# Altium PCB arduino-nano_autoroute.PcbDoc
Units mil, origin at the board's own origin, x right, y up, seen from the top; angles counter-clockwise.
Board outline 720 x 1780 mil, 6 copper layers (Top Layer, VCC, Signal Layer Top, Signal Layer Bottom, GND, Bottom Layer), stack 32.066 mil thick; 25 components, 41 nets, 165 pads, 84 vias.
Unrouted connection lines stored in the file: 34.
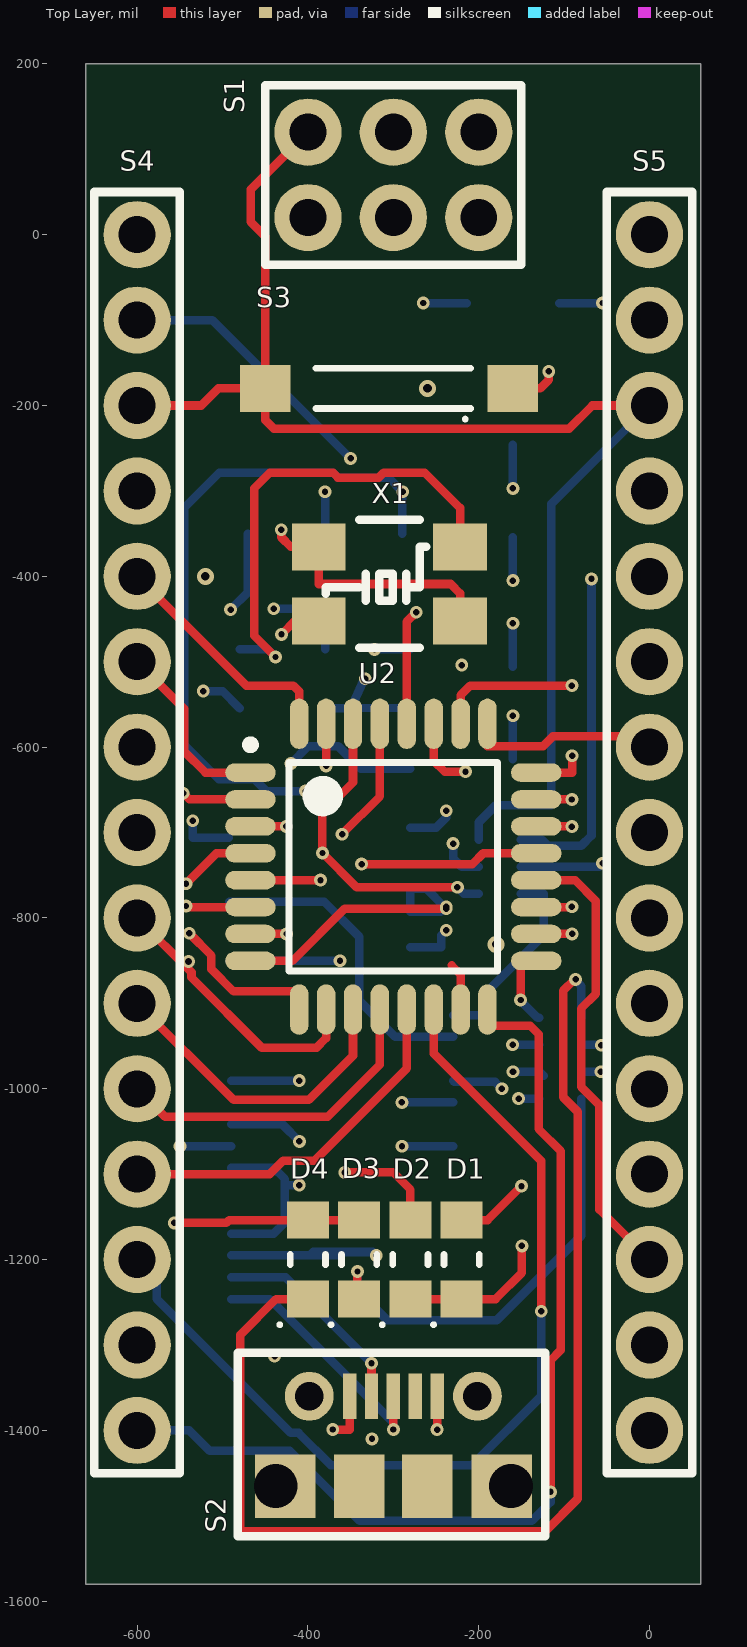
[diagram p0: Top Layer view]
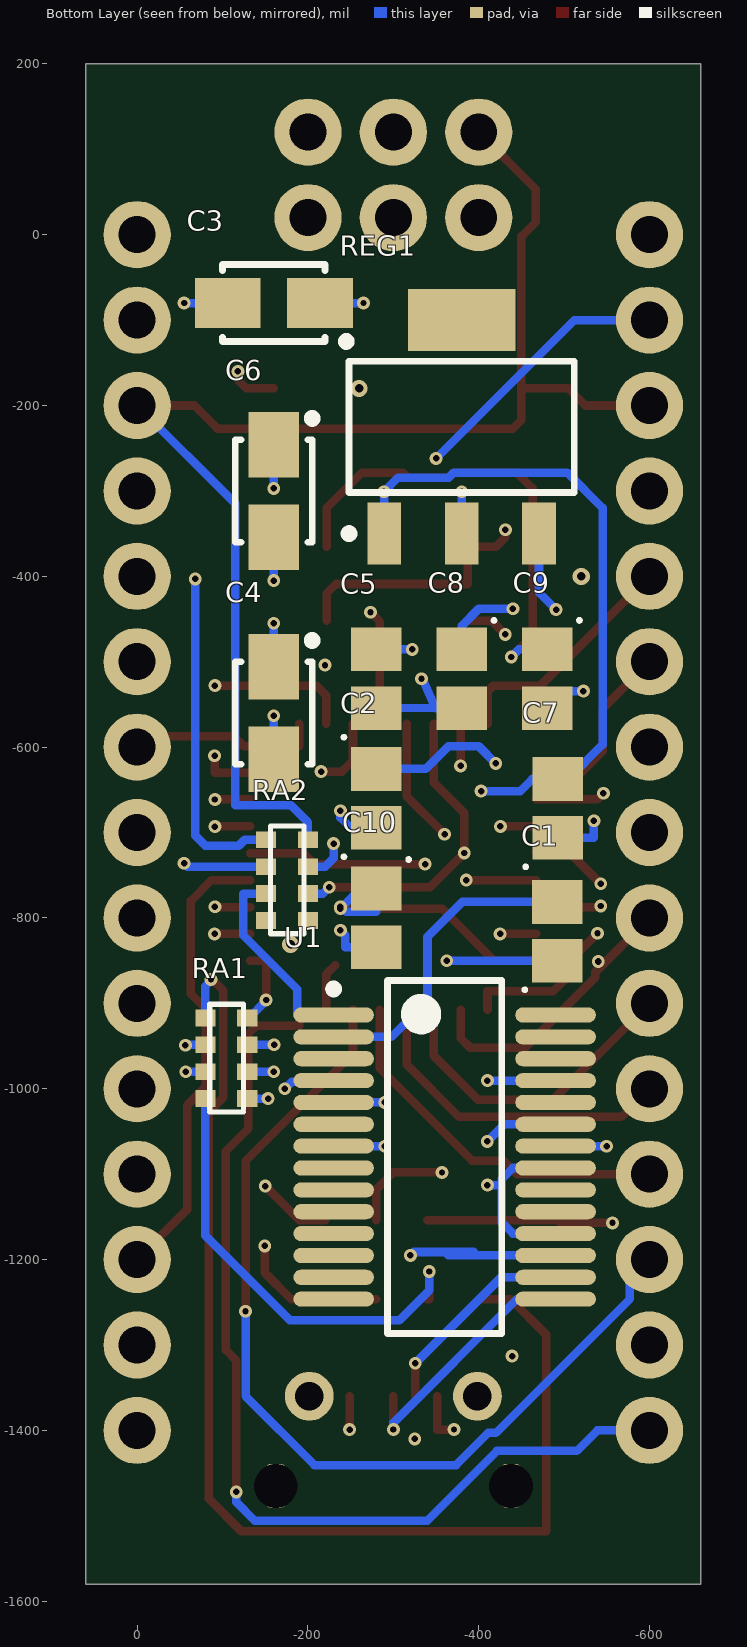
[diagram p1: Bottom Layer view, seen from below]
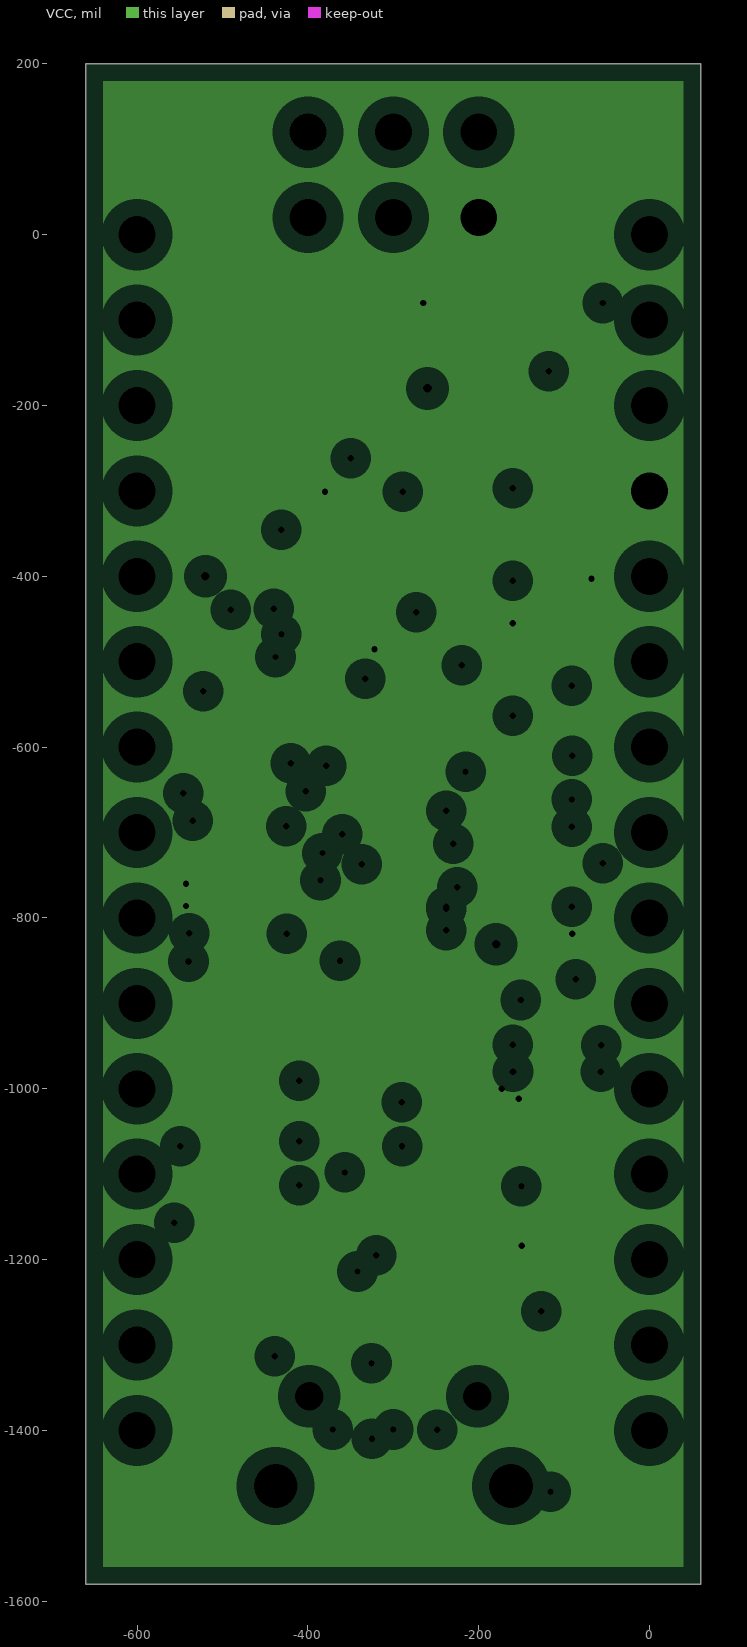
[diagram p2: VCC, clearances drawn from the general rule]
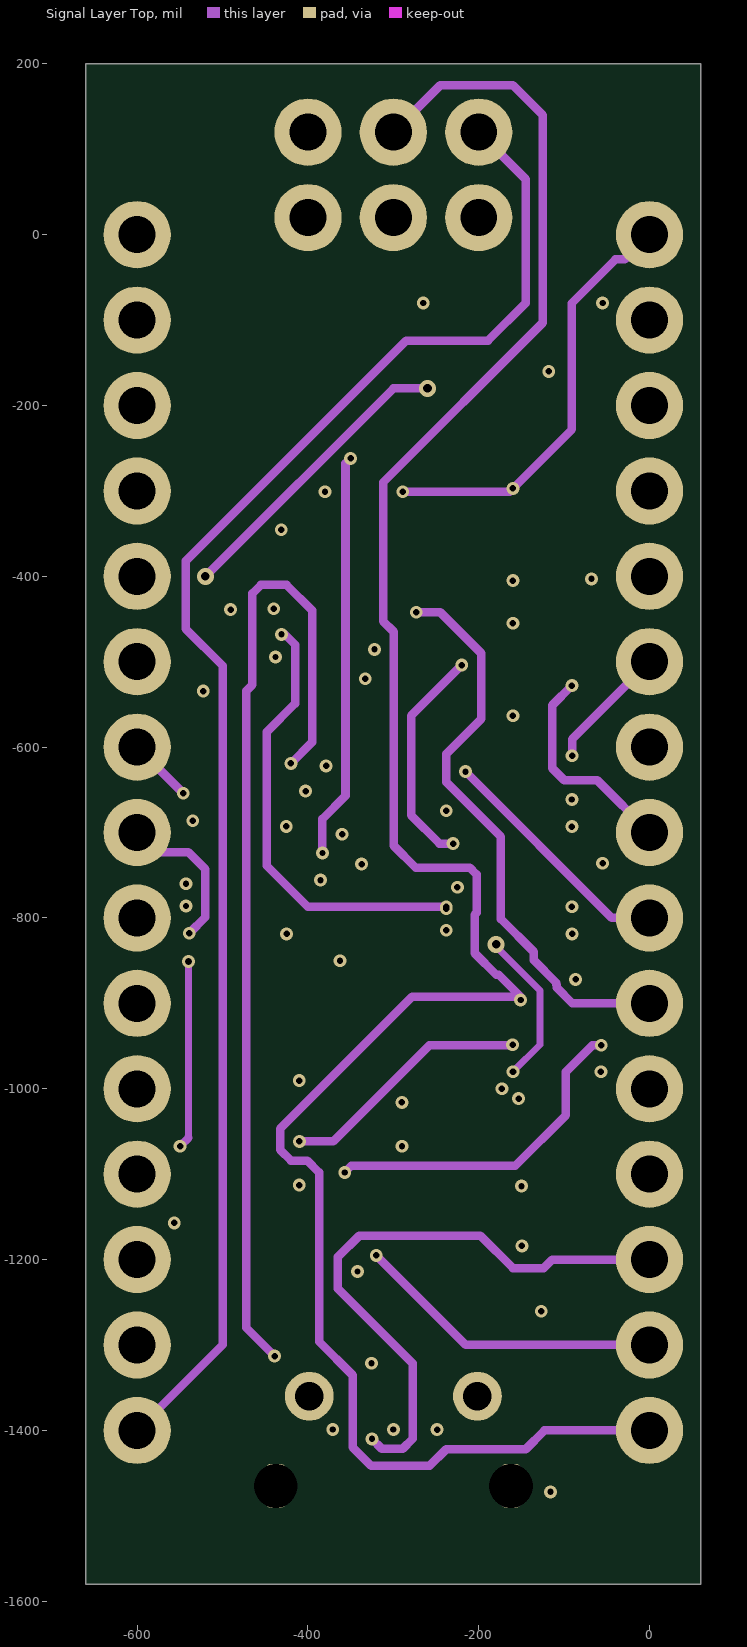
[diagram p3: Signal Layer Top]
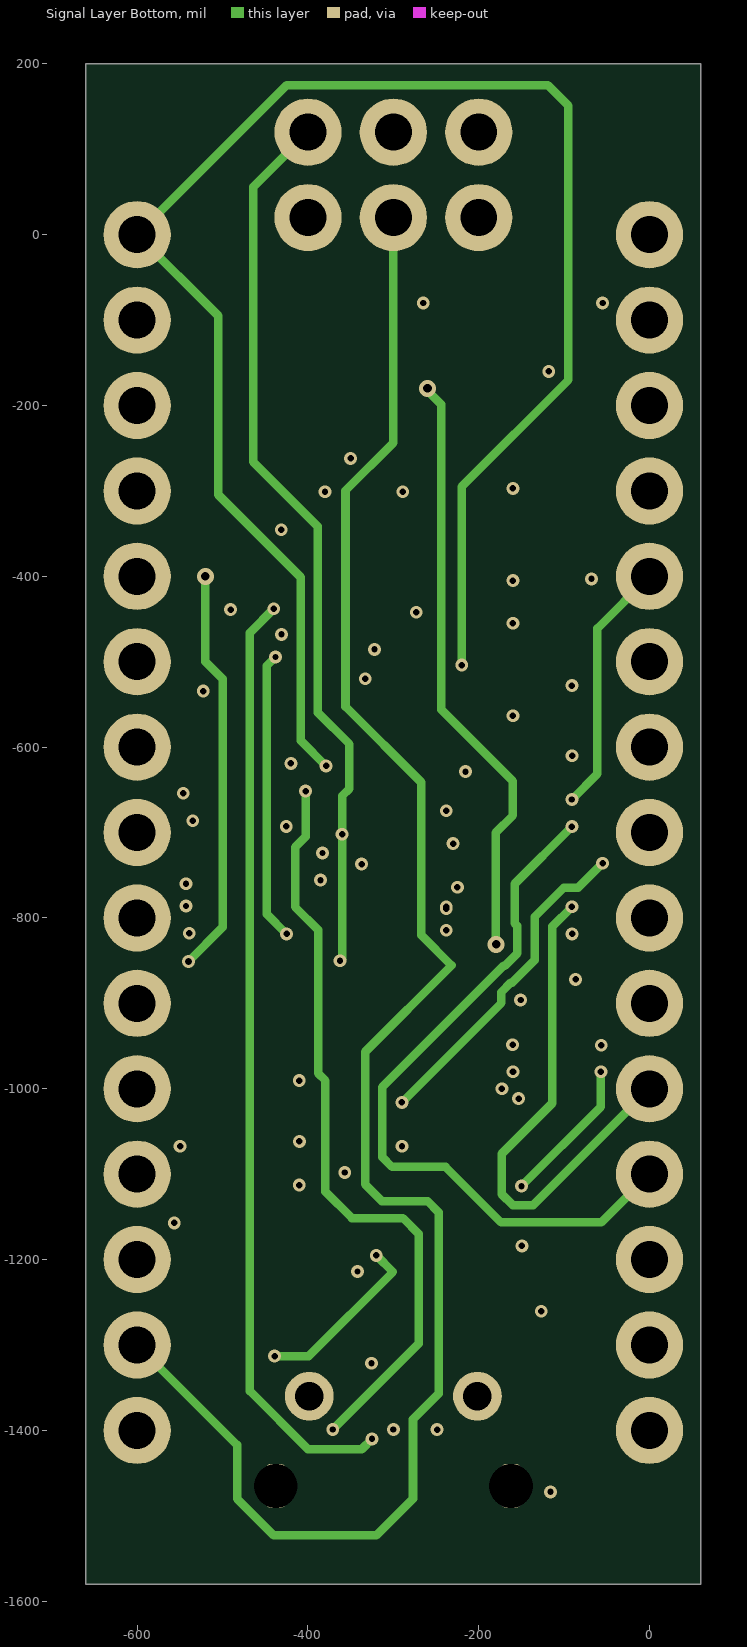
[diagram p4: Signal Layer Bottom]
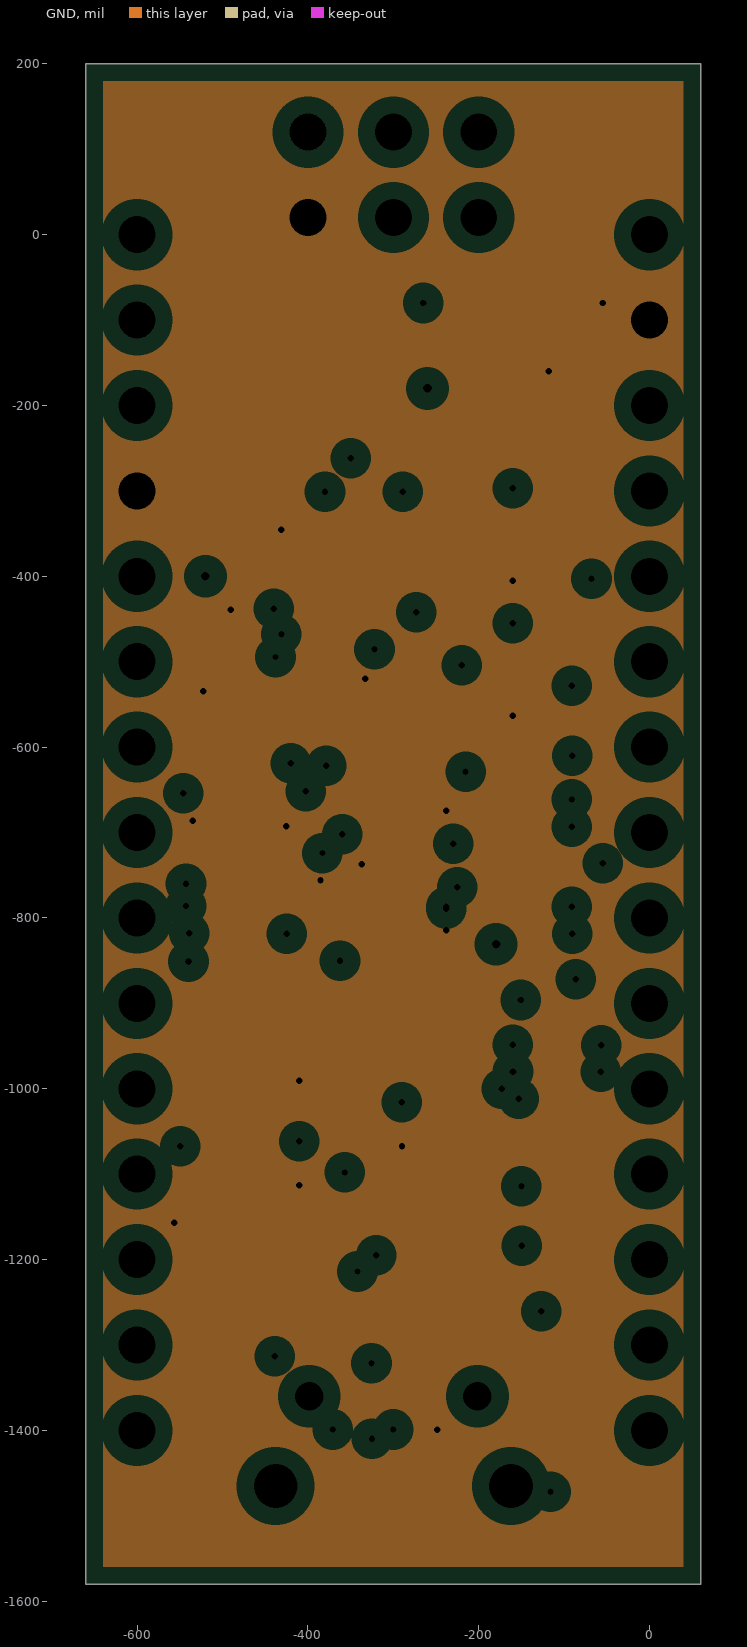
[diagram p5: GND, clearances drawn from the general rule]

## Layer stack, top to bottom
Top Solder: solder mask 0.4, Solder Resist, Dk 3.5
Top Layer: signal copper 1.378
Dielectric 2: prepreg 2.8, PP-006, Dk 4.1
VCC: plane copper 1.378, net 5V
Dielectric 4: prepreg 2.8, PP-006, Dk 4.1
Signal Layer Top: signal copper 1.378
Dielectric 1: dielectric 12.5984, FR-4, Dk 4.8
Signal Layer Bottom: signal copper 1.378
Dielectric 5: prepreg 2.8, PP-006, Dk 4.1
GND: plane copper 1.378, net GND
Dielectric 3: prepreg 2.8, PP-006, Dk 4.1
Bottom Layer: signal copper 1.378
Bottom Solder: solder mask 0.4, Solder Resist, Dk 3.5

## Board outline
-660,-1580 60,-1580 60,200 -660,200

## Design rules (kind name [scope] priority, off if disabled: settings)
Clearance [All] p1: gap=10 ignorepadtopadclearanceinfootprint=FALSE except(0: Arc-Hole Track-Hole SMDPad-Hole THPad-Hole Via-Hole Fill-Hole Poly-Hole Region-Hole Text-Hole)
PlaneClearance [All] p1: clearance=20
PlaneConnect [All] p1: planeconnectstyle=Relief reliefexpansion=20 reliefentries=4 reliefconductorwidth=10 reliefairgap=10
PolygonConnect [All] p1: connectstyle=Relief reliefconductorwidth=10 reliefentries=4 polygonreliefangle="90 Angle" airgapwidth=10
RoomDefinition arduino-nano [InComponentClass('arduino-nano')] p1: confinementstyle=ConfineIn formatcopy=TRUE lockcomponents=FALSE outline -5560,-2600 -3560,-2600 -3560,-1600 -5560,-1600
RoutingVias [All] p1: holewidth=7.5 width=15 viastyle="Through Hole" minholewidth=5 minwidth=10 maxholewidth=10 maxwidth=20
SolderMaskExpansion [All] p1: expansion=4 istentingtop=FALSE
Width [All] p1: maxlimit=10 minlimit=8 preferedwidth=10 minimp=50.000000 maximp=50.000000 favimp=50.000000
28 further rules are at their usual default settings.

## Components (designator, comment, footprint, x,y, rotation, side; value= is the part's Value field where it differs from the comment)
C1 "100nF Ceramic Multilayer Capacitor_1" CAPCP2012X09N -491.87,-815.68 r90 bottom
C2 "100nF Ceramic Multilayer Capacitor_1" CAPCP2012X09N -280,-660 r90 bottom
C3 "Capacitor SMT Tantalum" "CASE A - 3216X18" -160,-80 r0 bottom value=4.7µF
C4 "Capacitor SMT Tantalum" "CASE A - 3216X18" -160,-560 r270 bottom value=4.7µF
C5 "100nF Ceramic Multilayer Capacitor_1" CAPCP2012X09N -280,-520 r90 bottom
C6 "Capacitor SMT Tantalum" "CASE A - 3216X18" -160,-300 r270 bottom value=4.7µF
C7 "100nF Ceramic Multilayer Capacitor_1" CAPCP2012X09N -492.75,-671.76 r90 bottom
C8 "100nF Ceramic Multilayer Capacitor_1" CAPCP2012X09N -380,-520 r270 bottom
C9 "C0805C180J5GACTU" CAPCP2012X09N -480,-520 r270 bottom
C10 "C0805C180J5GACTU" CAPCP2012X09N -280,-800 r270 bottom
D1 "Kingbright Green LED, 70 mcd 120 ° 0805" LED1913X12NGREEN -220,-1200 r90 top
D2 "Kingbright Red LED, 100 mcd 120 ° 0805" LED1913X12NRED -280,-1200 r90 top
D3 "Kingbright Blue LED, 60 mcd 120 ° 0805" LED1913X12NBLUE -340,-1200 r90 top
D4 "Kingbright Orange LED, 200 mcd 120 ° 0805" LED1913X12NYEL/ORANGE -400,-1200 r90 top
RA1 "1k +- 5% SMT Resistor Array" "1206 RA" -124,-917.01 r270 bottom
RA2 "1k +- 5% SMT Resistor Array" "1206 RA" -195,-708.5 r270 bottom
REG1 "LM1117MP-5.0/NOPB, Low Dropout Voltage Regulator, 1.5A, 5 V ±1%, 4-Pin SOT-223" SOT230P700X180-4N -380,-225 r90 bottom
S1 "Programming Headers Dual Row" "ISP HEADER" 495,-435 r180 top
S2 "NewMolex Right Angle SMT Female Type B Micro USB Connector, 30 V ac, 1.8A" MicroUSB -348.42,-1360 r0 top
S3 "Tactile Switch SPST- NO 0.05A @24V" Button8014X17N -300,-180 r180 top
S4 "connector;str header;single row;.1 cont centers;.095 tail;gold or gtx;36 contact" Header -600,0 r270 top
S5 "connector;str header;single row;.1 cont centers;.095 tail;gold or gtx;36 contact" Header 0,0 r270 top
U1 "FT232RL, Universal Asynchronous Receiver & Transmitter 3MBd, 28-Pin, SSOP" SOP65P780X200-28N -360,-1080 r180 bottom
U2 "ATMEGA328P-AU" TQFP80P900X900X120-32N -300,-740 r0 top
X1 "Aker 16MHz Crystal SMT" "Aker S5C Crystal" -221.89,-365.51 r0 top value=16MHz

## Footprints (in the part's own frame and the unit in brackets; to place one, negate y for a bottom-side part, rotate by r counter-clockwise, add the part's x,y. Pads: shape width x height; smd on the part's side, far side on the other; paste and mask are expansions set on the pad)
"1206 RA" [mm]
  rect 0.5x0.6 smd: 1(0,0.127) 2(0.8,0.127) 3(1.6,0.127) 4(2.4,0.127) 5(0,-1.118) 6(0.8,-1.118) 7(1.6,-1.118) 8(2.4,-1.118)
  silkscreen extent -0.41,-0.99 2.79,0.01, body extent -0.41,-1.31 2.79,0.29, height 0.5
"Aker S5C Crystal" [mm]
  rect 1.6x1.4 smd: 1(0,0) 2(-4.2,0) 3(0,-2.2) 4(-4.2,-2.2)
  round 0.254 on Top Overlay: 5(-3,-2.4)
  silkscreen extent -4,-3 -1,0.8, body extent -4.7,-2.8 0.5,0.6, height 1
Button8014X17N [mm] "Chip Inductor, 2-Leads, Body 8.00x1.40mm, IPC Medium Density"
  rect 1.5x1.4 smd: 1(-3.556,0) 2(3.81,0)
  silkscreen extent -2.3,-0.6 2.3,0.96, body extent -3.79,-1.92 4.21,1.78, height 2.5
CAPCP2012X09N [mm] "Chip Capacitor, 2-Leads, Body 2.00x1.25mm, IPC Medium Density"
  rect 1.3x1.5 smd: 1(-0.875,0) 2(0.875,0)
  silkscreen extent -1.79,0.91 -1.69,1.01, body extent -1.05,-0.57 0.95,0.68, height 0.78
"CASE A - 3216X18" [mm] "Molded Capacitor, 2-Leads, Body 3.2x1.6mm, IPC Medium Density"
  rect 1.95x1.5 smd: 1(-1.375,0) 2(1.375,0)
  silkscreen extent -2.28,-1.14 1.52,1.27, body extent -1.52,-0.76 1.65,0.84, height 1.77
Header [mm] "SIL Header"
  round 2 hole 1.1: 1(0,0) 2(2.54,0) 3(5.08,0) 4(7.62,0) 5(10.16,0) 6(12.7,0) 7(15.24,0) 8(17.78,0) 9(20.32,0) 10(22.86,0) 11(25.4,0) 12(27.94,0) 13(30.48,0) 14(33.02,0) 15(35.56,0)
  silkscreen extent -1.27,-1.27 36.83,1.27, body extent -1.33,-1.35 36.93,1.35, height 8.6
"ISP HEADER" [mm] "SIL Header for programming"
  round 2 hole 1.1: 1(17.653,-14.097) 2(17.653,-11.557) 3(20.193,-14.097) 4(20.193,-11.557) 5(22.733,-14.097) 6(22.733,-11.557)
  silkscreen extent 16.38,-15.49 24,-10.16, body extent 16.38,-15.37 24,-10.29, height 8
LED1913X12NBLUE [mm] "LED 2-Leads, Body 1.90x1.32mm, IPC Medium Density"
  rect 1.1x1.25 smd: 1(-1.175,0) 2(1.175,0)
  silkscreen extent -1.99,-0.53 0.15,0.89, body extent -1,-0.62 1.02,0.62, height 1.1
LED1913X12NGREEN [mm] "LED 2-Leads, Body 1.90x1.32mm, IPC Medium Density"
  rect 1.1x1.25 smd: 1(-1.175,0) 2(1.175,0)
  silkscreen extent -1.99,-0.53 0.15,0.89, body extent -1.01,-0.62 1.01,0.63, height 1.1
LED1913X12NRED [mm] "LED 2-Leads, Body 1.90x1.32mm, IPC Medium Density"
  rect 1.1x1.25 smd: 1(-1.175,0) 2(1.175,0)
  silkscreen extent -1.99,-0.53 0.15,0.89, body extent -1.02,-0.43 1.04,0.47, height 0.85
LED1913X12NYEL/ORANGE [mm] "LED 2-Leads, Body 1.90x1.32mm, IPC Medium Density"
  rect 1.1x1.25 smd: 1(-1.175,0) 2(1.175,0)
  silkscreen extent -1.99,-0.53 0.15,0.89, body extent -1.01,-0.62 1.01,0.63, height 1.1
MicroUSB [mm] "MicroUSB  Molex 5Pin"
  rect 0.4x1.35 smd: 1(-0.07,0) 2(0.58,0) 3(1.23,0) 4(1.88,0) 5(2.53,0)
  rrect50% 0.6x1.3 hole 1.3: ""(-2.27,-2.667) ""(-2.27,-2.667) ""(4.73,-2.667)
  rect 1.8x1.9 smd: ""(-1.98,-2.678) ""(4.45,-2.678)
  round 1.45 hole 0.85: ""(-1.27,0) ""(3.73,0)
  rect 1.5x1.9 smd: ""(0.218,-2.678) ""(2.242,-2.678)
  silkscreen extent -3.39,-4.17 5.75,1.3, body extent -2.83,-5.32 5.37,0.11, height 2.68
SOP65P780X200-28N [mm] "SOP, 28-Leads, Body 10.20x5.30mm, Pitch 0.65mm, IPC Medium Density"
  oval 2.4x0.45 smd: 1(-3.3,4.225) 2(-3.3,3.575) 3(-3.3,2.925) 4(-3.3,2.275) 5(-3.3,1.625) 6(-3.3,0.975) 7(-3.3,0.325) 8(-3.3,-0.325) 9(-3.3,-0.975) 10(-3.3,-1.625) 11(-3.3,-2.275) 12(-3.3,-2.925) 13(-3.3,-3.575) 14(-3.3,-4.225) 15(3.3,-4.225) 16(3.3,-3.575) 17(3.3,-2.925) 18(3.3,-2.275) 19(3.3,-1.625) 20(3.3,-0.975) 21(3.3,-0.325) 22(3.3,0.325) 23(3.3,0.975) 24(3.3,1.625) 25(3.3,2.275) 26(3.3,2.925) 27(3.3,3.575) 28(3.3,4.225)
  silkscreen extent -3.43,-5.25 1.7,5.25, body extent -3.91,-5.1 3.91,5.1, height 2
SOT230P700X180-4N [mm] "SOT223, 4-Leads, Body 6.50x7.00mm (avg), Pitch 2.30mm, IPC Medium Density"
  rect 1.85x1 smd: 1(-3.175,2.3) 2(-3.175,0) 3(-3.175,-2.3)
  rect 1.85x3.2 smd: 4(3.175,0)
  silkscreen extent -3.3,-3.35 1.95,3.48, body extent -3.8,-3.12 3.29,3.38, height 1.65
TQFP80P900X900X120-32N [mm] "TQFP, 32-Leads, Body 7.00x7.00mm, Pitch 0.80mm, IPC Medium Density"
  oval 1.5x0.55 smd: 1(-4.25,2.8) 2(-4.25,2) 3(-4.25,1.2) 4(-4.25,0.4) 5(-4.25,-0.4) 6(-4.25,-1.2) 7(-4.25,-2) 8(-4.25,-2.8) 17(4.25,-2.8) 18(4.25,-2) 19(4.25,-1.2) 20(4.25,-0.4) 21(4.25,0.4) 22(4.25,1.2) 23(4.25,2) 24(4.25,2.8)
  oval 0.55x1.5 smd: 9(-2.8,-4.25) 10(-2,-4.25) 11(-1.2,-4.25) 12(-0.4,-4.25) 13(0.4,-4.25) 14(1.2,-4.25) 15(2,-4.25) 16(2.8,-4.25) 25(2.8,4.25) 26(2,4.25) 27(1.2,4.25) 28(0.4,4.25) 29(-0.4,4.25) 30(-1.2,4.25) 31(-2,4.25) 32(-2.8,4.25)
  silkscreen extent -4.37,-3.1 3.1,3.75, body extent -4.43,-4.5 4.57,4.5, height 1.6

## Part data
C1 C2 C5 C7 C8: "AVX 0805 Standard 100nF Ceramic Multilayer Capacitor, 50 V dc X7R Dielectric ±10% SMD", Capacitance=100nF, Manufacturer=AVX, Package=0805, Voltage=50V, Creator="Ritesh Kanjee", Datasheet URL=http://za.rs-online.com/web/p/ceramic-multilayer-capacitors/4646688/, Date Created="18 February 2015", RS Stock No.=464-6688
C3 C4 C6: library part "4.7µF Tant RS 496-3545", "Capacitor,tantalum,SMT,16V,4.7uF,10%,A-case", Package=3216-18, Tolerance=10%, Voltage=16V, ComponentLink1Description="Supplier Website", ComponentLink1URL=http://za.rs-online.com/web/search/searchBrowseAction.html?method=getProduct&R=4963545, ComponentLink2Description="RS Data sheet", ComponentLink2URL=http://docs-europe.origin.electrocomponents.com/webdocs/04ed/0900766b804ed4cc.pdf, LatestRevisionDate=28-April-2010, Part Originator="H Theron", Publisher=DPSS, RS Stock Nr.=496-3545
C9 C10: library part "18pF Ceramic Multilayer Capacitor, 50 V dc C0G Dielectric ±5% SMD", "18pF Ceramic Multilayer Capacitor, 50 V dc C0G Dielectric ±5% SMD", Capacitance=18pF, Manufacturer=Kemet, Package=0805, Voltage=50V, Creator="Ritesh Kanjee", Datasheet URL=http://za.rs-online.com/web/p/ceramic-multilayer-capacitors/6480935/?searchTerm=C0805C180J5GACTU&relevancy-data=636F3D3226696E3D4931384E4B6E6F776E41734D504E266C753D656E266D6D3D6D61746368616C6C7061727469616C26706D3D5E5B5C707B4C7D5C707B4E647D2D2C2F255C2E5D2B2426706F3D313326736E3D592673743D4D414E5F504152545F4E554D4245522677633D424F5448267573743D4330383035433138304A35474143545526, Date Created="18 February 2015", RS Stock No.=648-0935
D1: Color=Green, Forward Voltage="2.1 V", Manufacturer=KingBright, Manufacturer Part No.=KP-2012MGC, Creator="Ritesh Kanjee", Datasheet URL=http://za.rs-online.com/web/p/visible-leds/4663778/, Date Created="18 February 2015", RS Stock No.=466-3778
D2: Color=RED, Forward Voltage=1.85V, Manufacturer=KingBright, Manufacturer Part No.=KP-2012SRC-PRV, Creator="Ritesh Kanjee", Datasheet URL=http://za.rs-online.com/web/p/visible-leds/4663813/, Date Created="18 February 2015", RS Stock No.=466-3813
D3: Color=Blue, Forward Voltage=3.2V, Manufacturer=KingBright, Manufacturer Part No.=KP-2012PBC-A, Creator="Ritesh Kanjee", Datasheet URL=http://za.rs-online.com/web/p/visible-leds/4663784/, Date Created="18 February 2015", RS Stock No.=466-3784
D4: Color=Orange, Forward Voltage=1.85V, Manufacturer=KingBright, Manufacturer Part No.=KP-2012SEC, Creator="Ritesh Kanjee", Datasheet URL=http://za.rs-online.com/web/p/visible-leds/4663790/, Date Created="18 February 2015", RS Stock No.=466-3790
RA1 RA2: "1k +- 5% SMT Resistor Array 4 Res", Manufacturer=Bourns, Manufacturer Part No.=CAY16-102J4LF, Creator="R Kanjee", Date Created="25 February 2015", RS Stock No.=552-5579, Wattage=0.25W
REG1: library part LM1117MP-5.0, Manufacturer="Texas Instruments", Maximum Input Voltage=15V, Output Voltage=5V, Supply Current=1.5Amps, Created By="R Kanjee", Datasheet URL=http://za.rs-online.com/web/p/low-dropout-voltage-regulators/5339583/, Date Created="26 February 2015", RS Stock No.=533-9583
S1: library part "Programming ISP, Programming Headers Dual Row", Current Rating="3Amps Continuous", Manufacturer=FCI, Manufacturer Part No.=68000-236HLF, Created By="R Kanjee", Date Created="1 March 2015", RS Stock No.=2509565626
S2: library part "Micro USB Connector, 30 V ac, 1.8A", Manufacturer=Molex, Manufacturer Part No.=105017-0001, Max Current=1.8A, Max Voltage=30V, Creator="R Kanjee", Datasheet URL=http://za.rs-online.com/web/p/micro-usb-connectors/8486764/, Date Created="28 February 2015", RS Stock No=848-6764
S3: Manufacturer=Omron, Manufacturer Part No.=B3F1000, Creator="R Kanjee", Date Created="25 February 2015", RS Stock No.=686-6847, State="Normaly Open"
S4 S5: library part "Single row; PCB headers", Current Rating="3Amps Continuous", Manufacturer=FCI, Manufacturer Part No.=68000-236HLF, Created By="R Kanjee", Date Created="1 March 2015", RS Stock No.=2509565626
U1: library part "FT232RL USB to UART, Universal Asynchronous Receiver & Transmitter 3MBd, 28-Pin, SSOP", Manufacturer="FTDI Chip", Manufacturer Part No.=FT232RL, Creator="R Kanjee", Date Created="03 March 2015", Pin Count=28, RS Stock No.=406-580
U2: "Microchip ATMEGA328P-AU, 8bit AVR Microcontroller, 20MHz, 1 kB, 32 kB Flash, 32-Pin TQFP", Company=ComputeChip, Created By="Rajiv Bishwokarma", Datasheet URL=https://docs.rs-online.com/5775/0900766b80db4deb.pdf, Date Created="December 31, 2020", RS Stock No.=696-3092
X1: library part "Aker  C5S-16.000-12-3030-X", "Aker S5C SMT Crystal", Frequency Stability=+/-30ppm, Load Capacitance=12pF, Manufacturer=Aker, Manufacturer Part #=C5S-16.000-12-3030-X, Package="3.2x5mm SMD", Creator="R Kanjee", HelpURL=http://za.rs-online.com/web/p/crystal-units/6719488/, RS="RS 671-9488", RS Stock Nr.=671-9488, Supplier=RS

## Via types
v1: diameter 15, hole 7.5, Top Layer to Bottom Layer, 79 vias
v2: diameter 20, hole 10, Top Layer to Bottom Layer, 3 vias
v3: diameter 15, hole 8, Top Layer to Bottom Layer, 2 vias

## Nets (pads, with @x,y where several pads share a name; then routed paths per layer and width w, separated by ;. In a path a pad name is that pad's centre, name@x,y a point inside that pad or via, vN(x,y) a via of type N, cw(c..) or ccw(c..) an arc to the next point about the centre after c; other vN are vias at no path point)
3V3: C2.2 S5.14 U1.17 | length 2169.6
  Signal Layer Top w10: v1(-439,-1313) -472,-1280 -472,-534 -465,-527 -465,-420 -455,-410 -425,-410 -395,-440 -395,-594 v1(-420,-619) ; v1(-320,-1195.16) -215.16,-1300 S5.14
  Signal Layer Bottom w10: v1(-439,-1313) -399,-1313 -300.5,-1214.5 v1(-320,-1195)
  Bottom Layer w10: U1.17 -398.16,-1195.16 ; v1(-420,-619) -400,-599 -364.55,-599 -338,-625.55 C2.2 ; v1(-320,-1195.16) -323.66,-1191.5 -360.84,-1191.5 -364.5,-1195.16 -398.16,-1195.16 ; v1(-320,-1195) -324,-1191 -394,-1191 -398.16,-1195.16
5V: C3.1 C4.1 C5.2 D1.1 D2.1 RA1.4 RA2.5 REG1.2 S1.2 S5.4 U1.4 U1.20 U2.4 U2.6 U2.18 | length 1053.4
  Top Layer w10: v1(-542.81,-786) -542.81,-787.24 U2.6 ; v1(-542.81,-760) -507.06,-724.25 U2.4 ; D2.1 D1.1 -180.22,-1246.26 -149.43,-1215.47 v1(-149.43,-1184) ; U2.18 v1(-90.65,-818.74)
  Bottom Layer w10: REG1.2 v1(-380,-301.08) ; v1(-322.03,-485.55) C5.2 ; v1(-265.02,-80) C3.1 ; U1.4 -228.6,-991.91 -180.94,-991.91 v1(-172.85,-1000) ; C4.1 v1(-160,-454.98) ; v1(-153.31,-1011.5) RA1.4 ; RA2.5 -126,-708.5 -119,-715.5 -80,-715.5 -68,-703.5 v1(-68,-403)
A0: S5.5 U2.23 | length 340.6
  Top Layer w10: U2.23 v1(-91,-661.26)
  Signal Layer Bottom w10: v1(-91,-661.26) -61,-631.26 -61,-461 S5.5
A1: S5.6 U2.24 | length 209.3
  Top Layer w10: U2.24 -90.76,-629.76 v1(-90.76,-610)
  Signal Layer Top w10: v1(-90.76,-610) -90.76,-590.76 S5.6
A2: S5.7 U2.25 | length 226
  Top Layer w10: U2.25 -189.76,-599 -124.76,-599 -113.26,-587.5 -12.5,-587.5 S5.7
A3: S5.8 U2.26 | length 419.8
  Top Layer w10: U2.26 -221.26,-539.26 -210,-528 v1(-91,-528)
  Signal Layer Top w10: v1(-91,-528) -114,-551 -114,-624.76 -100,-638.76 -61.24,-638.76 S5.8
A4: S5.9 U2.27 | length 372.3
  Top Layer w10: U2.27 -252.76,-615.94 -240,-628.7 v1(-215.47,-628.7)
  Signal Layer Top w10: v1(-215.47,-628.7) -44.17,-800 S5.9
A5: S5.10 U2.28 | length 809.8
  Top Layer w10: U2.28 -284.25,-453 v1(-273.25,-442)
  Signal Layer Top w10: v1(-273.25,-442) -245,-442 -197,-490 -197,-567 -238,-608 -238,-641 -174,-705 -174,-801.27 -135.66,-839.61 -135.66,-849.39 -109,-876.05 -109,-877.92 -108.47,-878.45 -108.47,-881.8 -90.27,-900 S5.10
A6: S5.11 U2.19 | length 647.2
  Top Layer w10: U2.19 -91.24,-787.24 v1(-91,-787)
  Signal Layer Bottom w10: v1(-91,-787) -114,-810 -114,-1017 -173,-1076 -173,-1123.5 -160,-1136.5 -136.5,-1136.5 S5.11
A7: S5.12 U2.22 | length 892.4
  Top Layer w10: U2.22 -91.24,-692.76 v1(-91,-693)
  Signal Layer Bottom w10: v1(-91,-693) -157.91,-759.91 -157.91,-806.19 -154.69,-809.41 -154.69,-841.29 -169.33,-855.94 -170.96,-855.94 -313,-997.98 -313,-1080 -301.48,-1091.52 -238.78,-1091.52 -173.8,-1156.5 -56.5,-1156.5 S5.12
AREF: C8.1 S5.13 U2.20 | length 2441.1
  Top Layer w10: U2.20 -87.25,-755.75 -63,-780 -63,-889 -80.19,-906.19 -80.19,-997.74 -58.61,-1019.32 -58.61,-1141.39 S5.13
  Signal Layer Top w10: v1(-325,-1410) -313.5,-1421.5 -289,-1421.5 -277.5,-1410 -277.5,-1321.5 -365,-1234 -365,-1197 -340,-1172 -198,-1172 -160,-1210 -124,-1210 -114,-1200 S5.13
  Signal Layer Bottom w10: v1(-440,-438) -468,-466 -468,-1354 -400,-1422 -337,-1422 v1(-325,-1410)
  Bottom Layer w10: v1(-440,-438) -400,-438 -380,-458 C8.1
D0/RX: RA2.3 S4.2 U2.30 | length 1161.5
  Top Layer w10: U2.30 -347.24,-641.24 -383,-677 v1(-383,-724) -343.03,-763.97 v1(-225.03,-763.97)
  Signal Layer Top w10: v1(-383,-724) -383,-684 -356,-657 -356,-267.77 v1(-350.09,-261.91) v1(-350.09,-261.91)
  Bottom Layer w10: S4.2 -512,-100 v1(-350.09,-261.91) ; v1(-225.03,-763.97) -217.5,-771.5 RA2.3
D1/TX: RA2.2 S4.1 U2.31 | length 2371.4
  Top Layer w10: v1(-378.74,-622) U2.31
  Signal Layer Top w10: v1(-230,-713) -246,-713 -279,-680 -279,-563 v1(-220,-504)
  Signal Layer Bottom w10: v1(-378.74,-622) -408.5,-592.24 -408.5,-401 -505,-304.5 -505,-95 S4.1 -425,175 -119,175 -95,151 -95,-170 -220,-295 v1(-220,-504)
  Bottom Layer w10: v1(-230,-713) -230,-730 -220,-740 RA2.2
D2: S4.5 U2.32 | length 283.5
  Top Layer w10: S4.5 -471.95,-528.05 -416.95,-528.05 -410.24,-534.76 U2.32
D3: S4.6 U2.1 | length 215.6
  Top Layer w10: S4.6 -545,-555 -545,-604.76 -520,-629.76 U2.1
D4: S4.7 U2.2 | length 158.1
  Top Layer w10: v1(-546,-654) -538.74,-661.26 U2.2
  Signal Layer Top w10: S4.7 v1(-546,-654)
D5: S4.8 U2.9 | length 368.3
  Top Layer w10: v1(-539,-818) -513,-844 -513,-860 -487,-886 -410.24,-886 U2.9
  Signal Layer Top w10: S4.8 -577,-723 -540,-723 -520,-743 -520,-799 v1(-539,-818)
D6: S4.9 U2.10 | length 325.8
  Top Layer w10: S4.9 -536.35,-863.65 -536.35,-869.65 -454,-952 -390,-952 -378.74,-940.74 U2.10
D7: S4.10 U2.11 | length 374.9
  Top Layer w10: S4.10 -487.07,-1012.93 -398.93,-1012.93 -347.24,-961.24 U2.11
D8: S4.11 U2.12 | length 387.7
  Top Layer w10: S4.11 -567.07,-1032.93 -376.93,-1032.93 -315.75,-971.75 U2.12
D9: S4.12 U2.13 | length 435.9
  Top Layer w10: S4.12 -444.89,-1100 -429,-1084.11 -392.11,-1084.11 -284.25,-976.25 U2.13
D10: S4.13 U2.14 | length 1137.9
  Top Layer w10: U2.14 -252.76,-958.74 -126.93,-1084.57 v1(-126.93,-1260.5)
  Bottom Layer w10: S4.13 -577,-1200 -577,-1246.11 -420.07,-1403.04 -410.96,-1403.04 -373.38,-1440.62 -207.62,-1440.62 -126.93,-1359.93 v1(-126.93,-1260.5)
D11/MOSI: S1.4 S4.14 U2.15 | length 2222.2
  Top Layer w10: -231.76,-855.5 -221.26,-866 U2.15
  Signal Layer Bottom w10: S4.14 -483,-1417 -483,-1480 -440,-1523 -320,-1523 -277,-1480 -277,-1387 -247,-1357 -247,-1144.5 -260,-1131.5 -313.5,-1131.5 -333,-1112 -333,-956.74 -231.76,-855.5 -267.26,-820 -267.26,-641.18 -356,-552.44 -356,-299.64 -300,-243.64 S1.4
D12/MISO: S1.1 S4.15 U2.16 | length 3006.8
  Top Layer w10: U2.16 -189.76,-926 -140,-926 -130,-936 -130,-1047 -104,-1073 -104,-1306 -116,-1318 v1(-116,-1472)
  Signal Layer Top w10: S4.15 -499.53,-1299.53 -499.53,-505 -543,-461.53 -543,-382 -285,-124 -189,-124 -145,-80 -145,65 S1.1
  Bottom Layer w10: S4.15 -539,-1400 -515,-1424 -421.39,-1424 -339.39,-1506 -138,-1506 -116,-1484 v1(-116,-1472)
D13/SCK: RA1.1 S1.3 S5.15 U2.17 | length 2667.4
  Top Layer w10: v1@-151,-896.02 -151,-850.24 U2.17
  Signal Layer Top w10: S1.3 -245,175 -160,175 -125,140 -125,-103 -312,-290 -312,-452.53 -299.53,-465 -299.53,-715.47 -274,-741 -210.55,-741 -202.53,-749.02 -202.53,-794.08 -204.69,-796.24 -204.69,-841.29 -179.34,-866.65 -176.35,-866.65 -151,-892 -153,-892 -277.8,-892 -432.5,-1046.7 -432.5,-1071.61 -420,-1084.11 -400.89,-1084.11 -387,-1098 -387,-1296 -347.5,-1335.5 -347.5,-1420 -326,-1441.5 -257.5,-1441.5 -238,-1422 -145,-1422 -123,-1400 S5.15 ; v1(-150.97,-896.05) v1@-150.97,-892.03
  Bottom Layer w10: v1(-150.97,-896.05) -150.97,-897.01 -130.97,-917.01 RA1.1
  other v1: -150.97,-896.05
GND: C2.1 C3.2 C4.2 C5.1 C6.2 C7.1 C8.2 C9.2 C10.2 D3.2 D4.2 REG1.3 S1.6 S2.5 S3.1 S4.4 S5.2 U1.7 U1.18 U1.21 U1.25 U2.3 U2.5 U2.21 X1.2 X1.3 | length 1909.2
  Top Layer w10: v1(-556.57,-1157) -495.54,-1157 -492.28,-1153.74 D4.2 -400,-1154 -340,-1154 D3.2 ; U2.5 v1(-385.29,-755.75) ; U2.3 v1(-425.29,-692.76) ; v1(-431.24,-345.51) -431.24,-354.27 -420,-365.51 X1.2 -387.24,-409 -232.89,-409 -221.89,-420 X1.3 ; v1(-337.17,-737) -207.4,-737 -194.65,-724.25 U2.21 ; v1(-248.82,-1399.08) S2.5 ; S3.1 -127.97,-180 -117.97,-170 v1(-117.97,-160)
  Bottom Layer w10: v1(-534.77,-686.21) -534.77,-706.21 C7.1 ; v1(-522.5,-534.45) -500,-534.45 C9.2 ; v1(-490.55,-438.92) -470.55,-418.92 REG1.3 ; U1.18 -440,-1169.57 -427,-1156.57 -427,-1112.8 ; U1.21 -440,-1092.8 -427,-1105.8 -427,-1112.8 ; U1.25 v1(-410.18,-990.43) ; v1(-410.18,-1112.8) -427,-1112.8 ; C8.2 -349.45,-554.45 ; v1(-333,-520) -335,-522 -349.45,-554.45 ; v1(-289.82,-1067.2) U1.7 ; C10.2 -243.76,-834.45 -243.76,-820.24 v1(-237.97,-814.45) ; C2.1 -250,-694.45 -237.97,-682.42 v1(-237.97,-674.45) ; C5.1 -280,-554 -349.45,-554.45 ; C4.2 v1(-160,-563.25) ; v1(-160,-405.02) C6.2 ; C3.2 v1(-54.98,-80)
GREEN_TX: RA1.3 U1.22 | length 2028.9
  Signal Layer Top w8: -540,-1057.54 v3(-540,-850.84) ; v2@-179.69,-833.64 -128.47,-884.87 -128.47,-948.47 v3(-160,-980)
  Signal Layer Top w10: v1(-549.67,-1067.2) -540,-1057.54 ; v2(-520,-400) -300,-180 v2(-260,-180) ; v2@-179.69,-833.64 v2(-179.69,-830.94)
  Signal Layer Bottom w10: v3(-540,-850.84) -500,-810.82 -500,-520 -520,-500 v2(-520,-400) ; v2(-260,-180) -260,-182.71 -243.94,-198.76 -243.94,-556.06 -160,-640 -160,-680 -180,-700 -180,-830.63 v2(-179.69,-830.94)
  Bottom Layer w10: v1(-549.67,-1067.2) U1.22 ; v3(-160,-980) RA1.3 RA1.3@-124.16,-984.84
NetC1_2: C1.2 U1.2 | length 371.2
  Bottom Layer w10: C1.2 -380.77,-781.23 -340,-822 -340,-897 -297.75,-939.25 U1.2
NetC9_1: C9.1 U2.7 X1.1 | length 950.1
  Top Layer w10: U2.7 v1(-425,-818.74) ; v1(-437.97,-494.5) -463,-469.47 -463,-297 -444.58,-278.58 -370.68,-278.58 -364.85,-284.41 -317.08,-284.41 -311.17,-278.5 -263.39,-278.5 -221.89,-320 X1.1
  Signal Layer Bottom w10: v1(-437.97,-494.5) -448,-504.53 -448,-795.74 v1(-425,-818.74)
  Bottom Layer w10: C9.1 -446.92,-485.55 v1(-437.97,-494.5)
NetC10_1: C10.1 U2.8 X1.4 | length 952.2
  Top Layer w10: U2.8 -418.24,-850.24 -357,-789 v1(-238,-789) ; v1(-431,-468) -415.13,-452.13 X1.4
  Signal Layer Top w10: v1(-431,-468) -427,-468 -415,-480 -415,-549 -448,-582 -448,-739 -400,-787 v1(-238,-787)
  Bottom Layer w10: v1(-238,-789) v1@-239.4,-787.6 ; v1(-238,-787) -238.81,-787 v1@-239.4,-787.6 ; v1@-239.4,-787.6 -261.45,-765.55 C10.1 -280,-793 -244.81,-793 v1@-239.4,-787.6
NetD1_2: D1.2 RA1.7 | length 282
  Top Layer w10: D1.2 -189.74,-1153.74 v1(-150,-1114)
  Signal Layer Bottom w10: v1(-150,-1114) -57,-1021 v1(-57,-980)
  Bottom Layer w10: RA1.7 v1(-57,-980)
NetD2_2: D2.2 RA1.6 | length 536.8
  Top Layer w10: v1(-357,-1098) -300,-1098 -280,-1118 D2.2
  Signal Layer Top w10: v1(-357,-1098) -349,-1090 -157,-1090 -98,-1031 -98,-980 -67,-949 v1(-56.5,-949)
  Bottom Layer w10: RA1.6 -56.99,-948.5 v1(-56.5,-949)
NetD3_1: D3.1 RA1.8 | length 534.3
  Top Layer w10: v1(-342,-1214) -342,-1246.26 D3.1
  Bottom Layer w10: v1(-342,-1214) -342,-1236.05 -307.05,-1271 -179,-1271 -80,-1172 RA1.8
NetD4_1: D4.1 RA1.5 | length 1406.8
  Top Layer w10: D4.1 -437.26,-1246.26 -479,-1288 -479,-1518 -122,-1518 -84,-1480 -84,-1027 -101,-1010 -101,-885 -88,-872 -86.64,-872 v1(-86.55,-871.91)
  Bottom Layer w10: v1(-86.55,-871.91) -86.55,-873.26 -80,-879.81 RA1.5
NetS2_2: S2.2 U1.16 | length 244.6
  Top Layer w10: S2.2 v1(-325.59,-1321.41)
  Bottom Layer w10: U1.16 -426.25,-1220.75 v1(-325.59,-1321.41)
NetS2_3: S2.3 U1.15 | length 296.8
  Top Layer w10: v1(-300,-1399) S2.3
  Bottom Layer w10: U1.15 -444.66,-1246.34 -300,-1391 v1(-300,-1399)
RED_RX: RA1.2 U1.23 | length 416.1
  Signal Layer Top w10: v1(-410,-1061.61) -370.34,-1061.61 -257.72,-949 -160.82,-949 v1(-160.32,-948.5)
  Bottom Layer w10: U1.23 -430,-1041.61 v1(-410,-1061.61) ; v1(-160.32,-948.5) RA1.2
RESET: C1.1 RA2.1 S1.5 S3.2 S4.3 S5.3 U2.29 | length 2949.5
  Top Layer w10: S4.3 -525,-200 -505,-180 S3.2 ; S1.5 -467,53 -467,15 -450,-2 S3.2 ; v1(-360,-701.89) -315.75,-657.64 U2.29 ; S5.3 -67,-200 -94,-227 -440,-227 -450,-217 S3.2
  Signal Layer Bottom w10: S1.5 -464,56 -464,-266 -388.5,-341.5 -388.5,-559.5 -351.5,-596.5 -351.5,-648.71 -360,-657.21 v1(-360,-701.89) -360,-847.63 v1(-362.5,-850.13)
  Bottom Layer w10: C1.1 v1(-362.5,-850.13) ; RA2.1 -200,-688 -180,-668 -115,-668 -115,-315 S5.3
RX: RA2.7 U1.1 | length 238
  Bottom Layer w10: U1.1 -187.66,-913.66 -187.66,-883.66 -124,-820 -124,-771.5 RA2.7
TX: RA2.6 U1.5 | length 545.7
  Signal Layer Bottom w10: v1(-290,-1016) -173.47,-899.47 -173.47,-886.73 -162.67,-875.94 -161.05,-875.94 -134.69,-849.58 -134.69,-798.87 -100.32,-764.5 -83.5,-764.5 v1(-55,-736)
  Bottom Layer w10: v1(-290,-1016) U1.5 ; RA2.6 -59,-740 v1(-55,-736)
VUSB: C6.1 C7.2 REG1.1 S2.1 S5.1 | length 2272.7
  Top Layer w10: v1(-371,-1399) -351.18,-1399 S2.1
  Signal Layer Top w10: v1(-289,-301) -164,-301 v1(-160,-297) -91,-228 -91,-80 -40,-29 -29,-29 S5.1
  Signal Layer Bottom w10: v1(-402.79,-651.52) -402.79,-705 -415,-717.21 -415,-787 -388,-814 -388,-982 -379.5,-990.5 -379.5,-1120.5 -348.5,-1151.5 -288.8,-1151.5 -270.3,-1170 -270.3,-1298.3 v1(-371,-1399)
  Bottom Layer w10: v1(-402.79,-651.52) -448.73,-651.52 -462.94,-637.31 C7.2 -504.69,-637.31 -545,-597 -545,-320 -503.58,-278.58 -370.68,-278.58 -364.85,-284.41 -305.59,-284.41 v1(-289,-301) ; REG1.1 v1@-289.45,-301 ; v1(-160,-297) C6.1
pads on no net: RA2.4 RA2.8 REG1.4 S2. S2.4 U1.3 U1.6 U1.8 U1.9 U1.10 U1.11 U1.12 U1.13 U1.14 U1.19 U1.24 U1.26 U1.27 U1.28 X1.5

## Polygon pours and split planes (outlines as drawn)
5V on VCC (split plane): 39.9,-1559.9 -639.9,-1559.9 -639.9,179.9 39.9,179.9
GND on GND (split plane): 39.9,-1559.9 -639.9,-1559.9 -639.9,179.9 39.9,179.9

## Silkscreen, mask and mechanical layers (free items; w line width, h text height)
Mechanical 1:
  the board outline again, w6